# Altium PCB PCB1.PcbDoc
Units mil, origin at the board's own origin, x right, y up, seen from the top; angles counter-clockwise.
Board outline 4105.03 x 2720.03 mil, 2 copper layers (Top Layer, Bottom Layer); 30 components, 27 nets, 147 pads, 19 vias.
Unrouted connection lines stored in the file: 2.
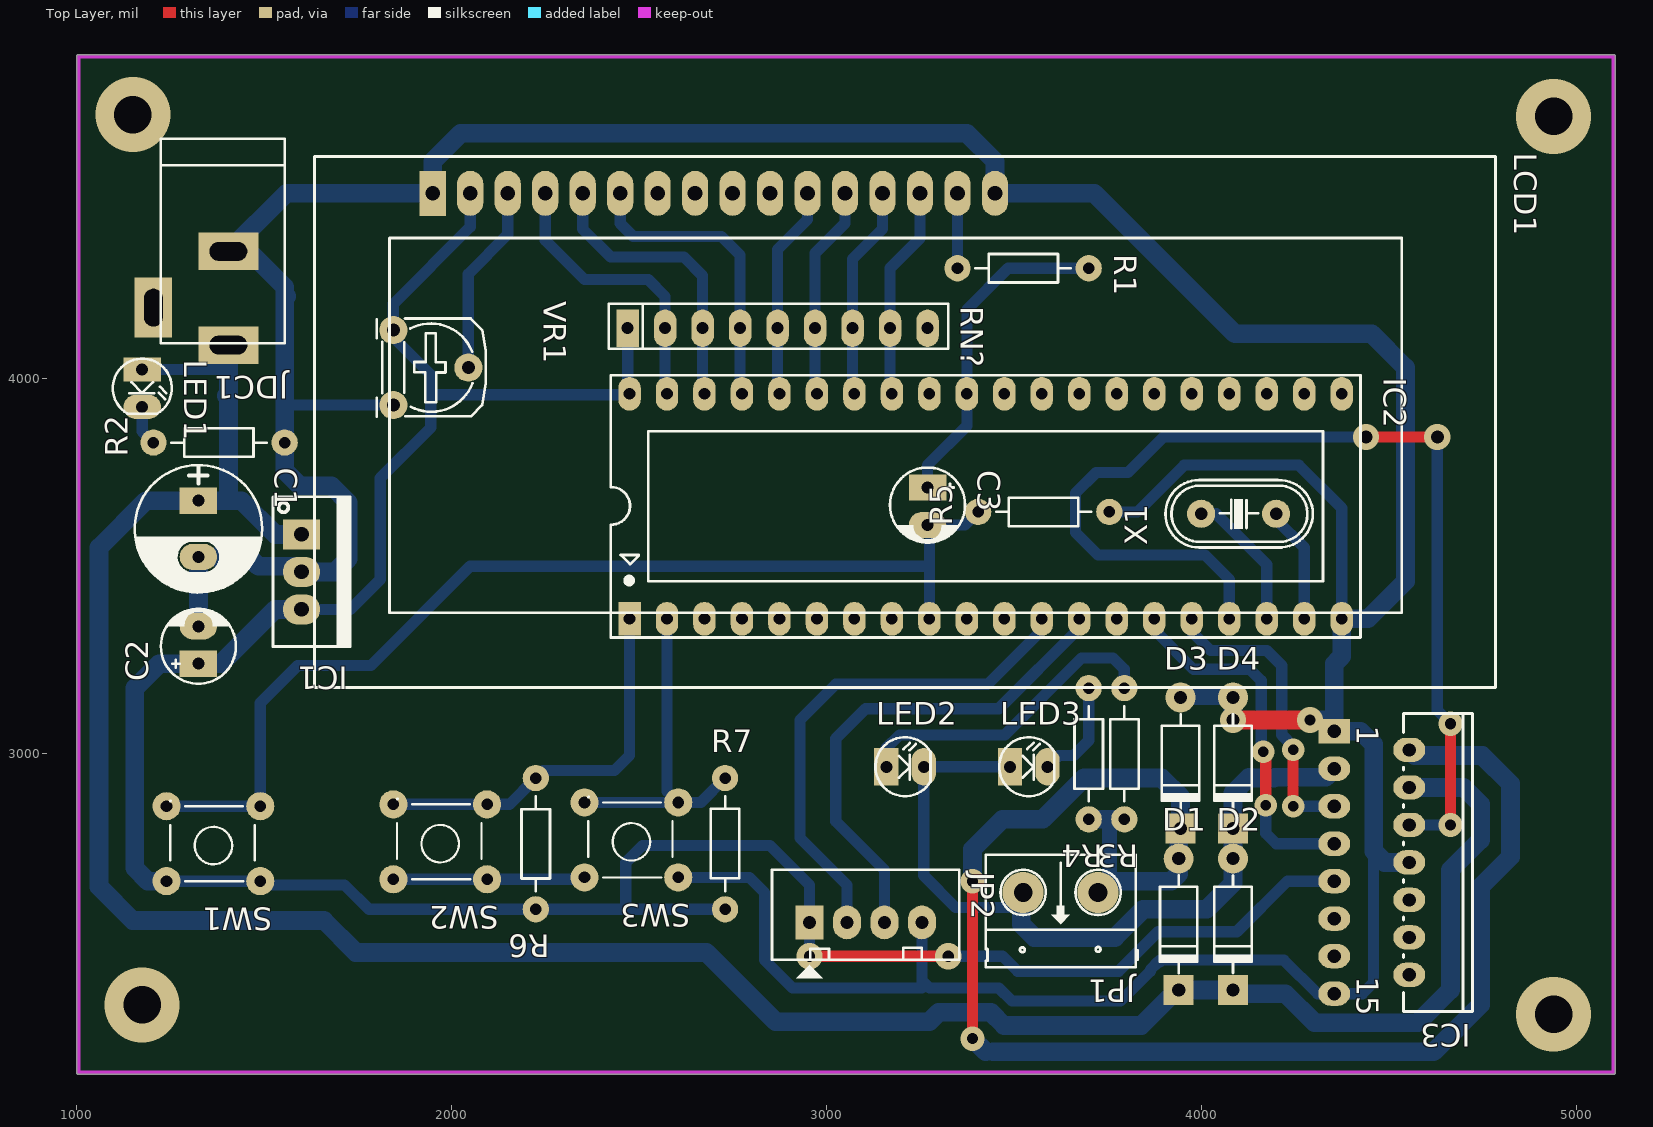
[diagram p0: Top Layer view]
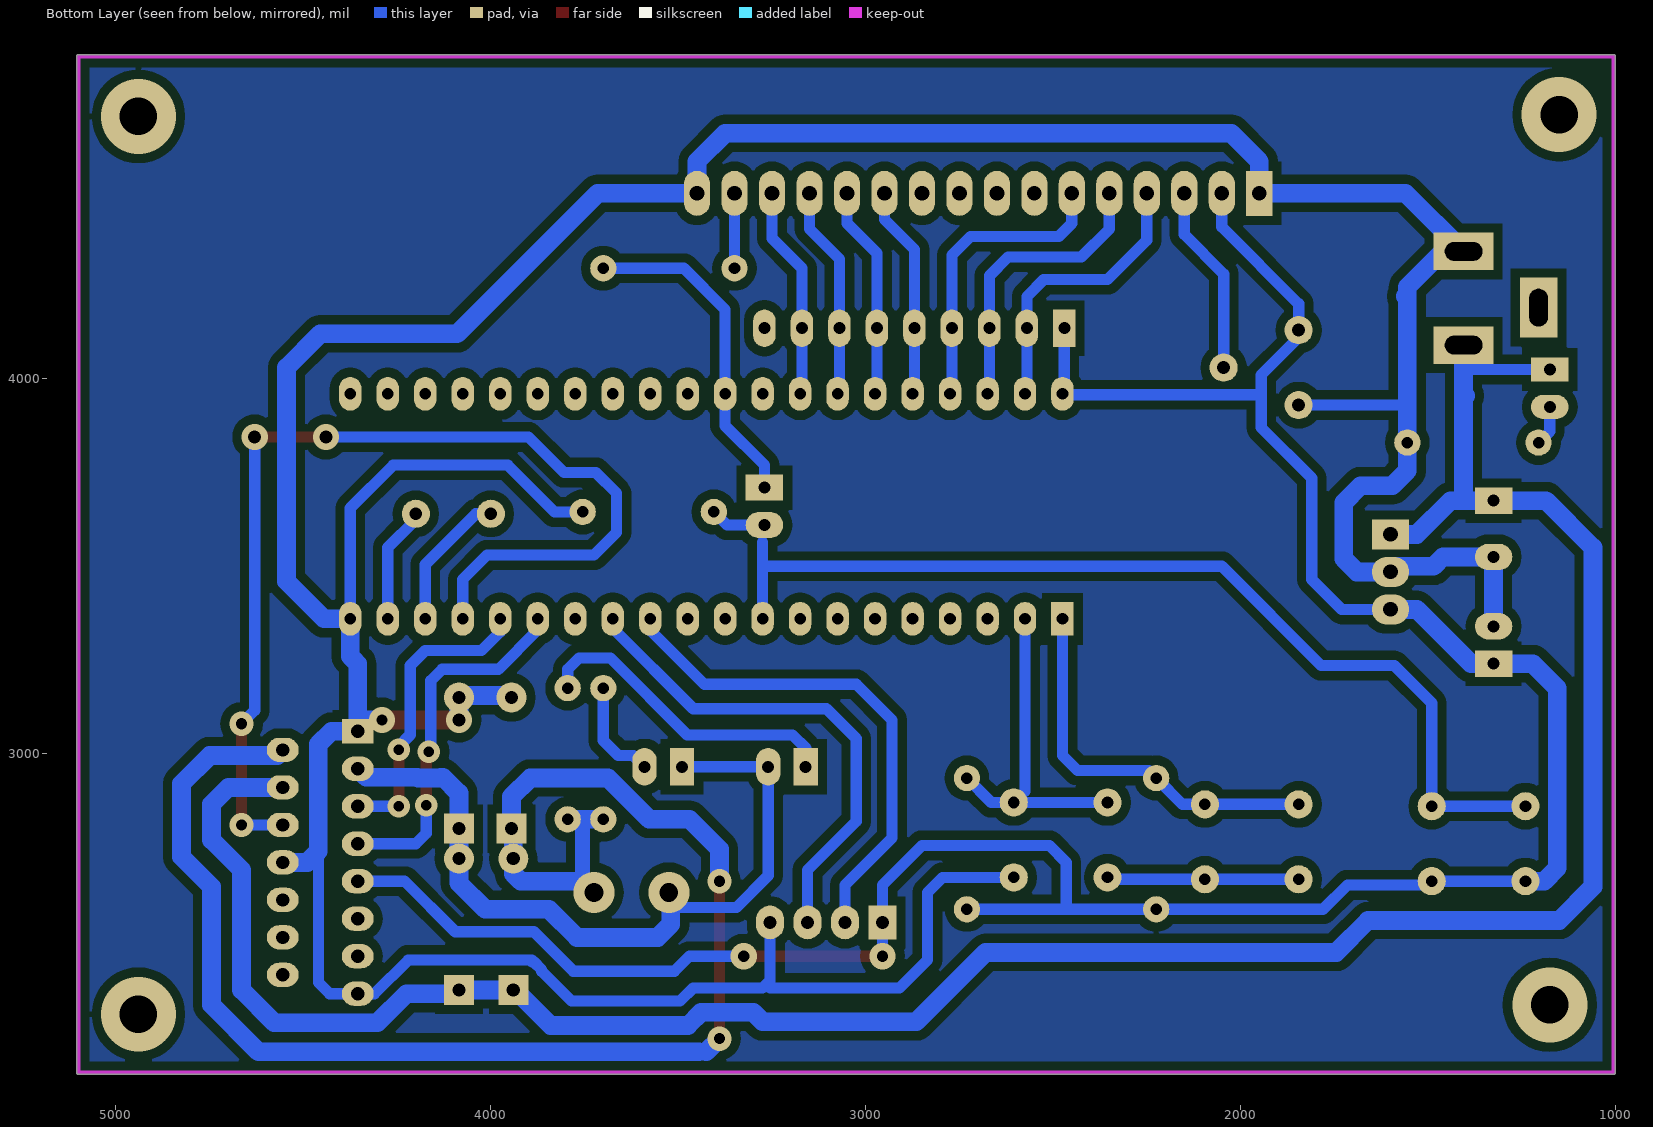
[diagram p1: Bottom Layer view, seen from below]
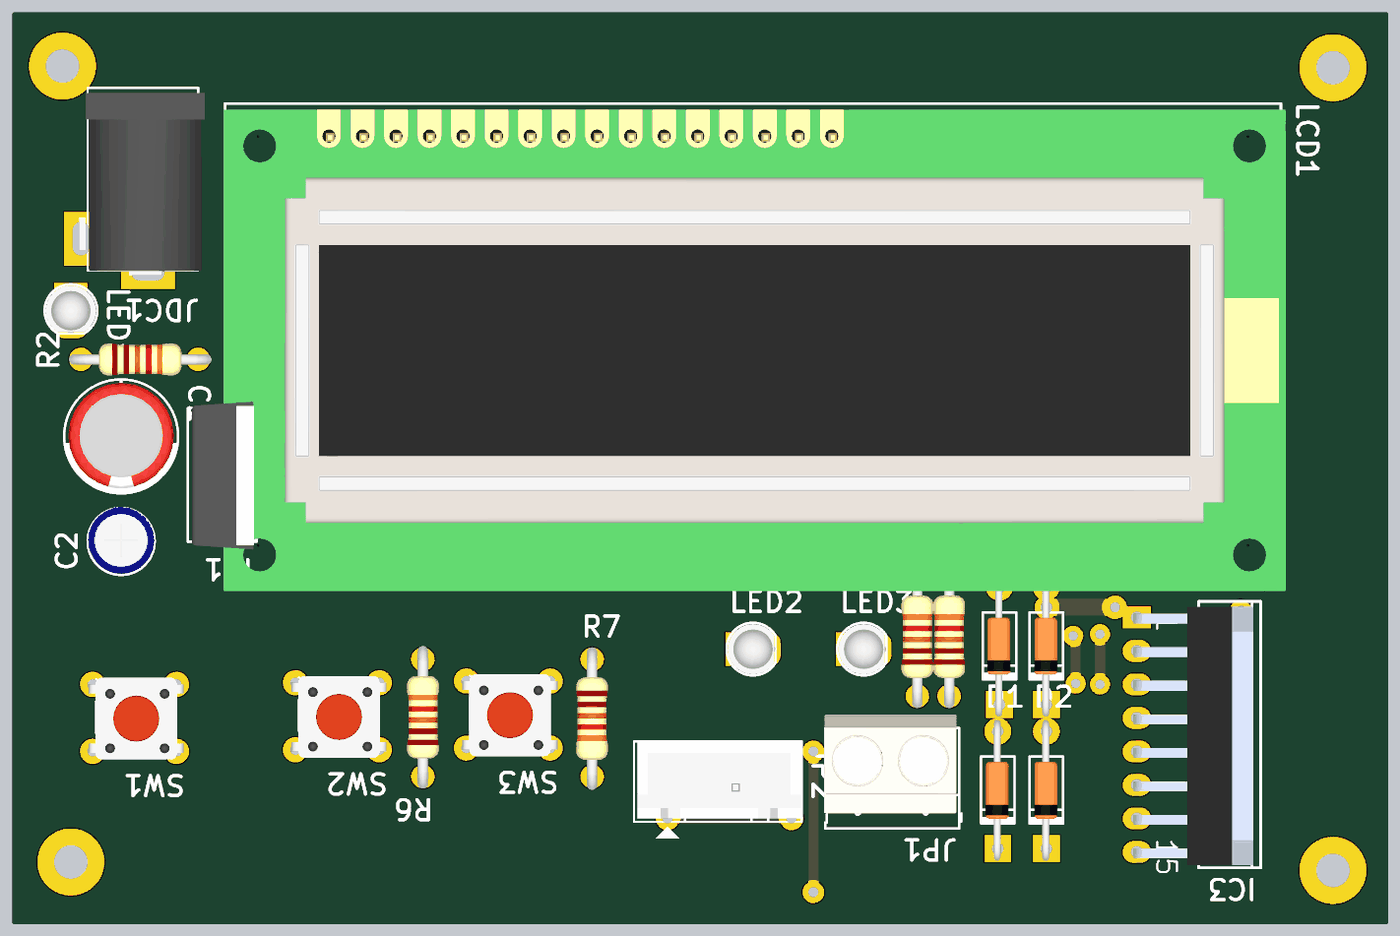
[diagram p2: 3D render of the assembled board from above, using the file's embedded part models]

## Layer stack, top to bottom
Top Layer: signal copper 1.4
Dielectric: dielectric 12.6, FR-4, Dk 4.8
Bottom Layer: signal copper 1.4

## Board outline
1005,2144.99 cw(c1005,2150) 999.99,2150 999.99,4860 cw(c1005,4860) 1005,4865.02 5100,4865.02 cw(c5100,4860) 5105.02,4860 5105.02,2150 cw(c5100,2150) 5100,2144.99

## Design rules (kind name [scope] priority, off if disabled: settings)
Clearance [All] p1: gap=25
PolygonConnect [All] p1: connectstyle=Relief reliefconductorwidth=10 reliefentries=4 polygonreliefangle="90 Angle"
RoutingVias [All] p1: holewidth=28 width=50 viastyle="Through Hole" minholewidth=28 minwidth=50 maxholewidth=28 maxwidth=50
SilkscreenOverComponentPads [All] p1: minsilkscreentomaskgap=10
SolderMaskExpansion [All] p1: expansion=4
Width [All] p1: maxlimit=50 minlimit=30 preferedwidth=40
27 further rules are at their usual default settings.

## Components (designator, comment, footprint, x,y, rotation, side; value= is the part's Value field where it differs from the comment)
C1 "1000uF/16V" CP1.5/3.4 1325,3675 r270 top
C2 "10uF" CP1/2 1325,3240 r90 top
C3 "10uF" CP1/2 3270,3710 r270 top
D1 "1N4007" D1A 3940,2720 r90 top
D2 "1N4007" D1A 4085,2720 r90 top
D3 "1N4007" D1A 3945,3150 r90 top
D4 "1N4007" D1A 4085,3150 r90 top
IC1 "LM7805" QTO-220 1600,3585 r270 top
IC2 "AT89S52" DIP40/W0.6 2475,3360 r0 top
IC3 "L298" DIP15SL2 4455,2710 r270 top
JDC1 "Jac DC" DC-IN 1305,4215 r270 top
JP1 "Header 2_1" HED2 3725,2630 r180 top
JP2 "JP4" CON4 2955,2550 r0 top
LCD1 "LCD16x2A" LCD16X2 1950,4495 r0 top
LED1 "LED" LED-3 1175,4025 r270 top
LED2 "LED" LED-3 3160,2965 r0 top
LED3 "LED" LED-3 3490,2965 r0 top
R1 "330" R1/4W 3350,4295 r0 top
R2 "1k" R1/4W 1555,3830 r180 top
R3 "1k" R1/4W 3795,3175 r270 top
R4 "1k" R1/4W 3700,3175 r270 top
R5 "10k" R1/4W 3755,3645 r180 top
R6 "10k" R1/4W 2225,2935 r270 top
R7 "10k" R1/4W 2730,2585 r90 top
RN? "10K" RN8 2470,4135 r0 top
SW1 "SW" SW4 1490,2660 r180 top
SW2 "SW" SW4 2095,2665 r180 top
SW3 "SW" SW4 2605,2670 r180 top
VR1 "10K" VR 1845,4130 r270 top
X1 "12Mhz" XT2 4100,3640 r180 top

## Footprints (in the part's own frame and the unit in brackets; to place one, negate y for a bottom-side part, rotate by r counter-clockwise, add the part's x,y. Pads: shape width x height; smd on the part's side, far side on the other; paste and mask are expansions set on the pad)
CON4 [mil] "CON4"
  rect 75x90 hole 34: 1(0,0)
  oval 75x90 hole 34: 2(100,0) 3(200,0) 4(300,0)
  silkscreen extent -100,-150 400,140, body extent -90,-90 398,136, height 276
CP1.5/3.4 [mil] "Tu hoa 220->470uF,16V, 470uF/16V,25V"
  rect 70x100 hole 32: 1(0,0)
  oval 70x100 hole 32: 2(150,0)
  silkscreen extent -95,-170 245,170, body extent -85,-157 230,157, height 446
CP1/2 [mil] "Tu hoa < 22uF/16>50V"
  rect 70x100 hole 32: 1(0,0)
  oval 70x100 hole 32: 2(100,0)
  silkscreen extent -53,-100 146,100, body extent -49,-99 149,99, height 287
D1A [mil] "Diode 1A, W 100mil, L 350mil"
  round 80 hole 35: 1(0,0)
  rect 80x80 hole 35: 2(-350,0)
  silkscreen extent -305,-50 -45,50, body extent -386,-33 34,36, height 84
DC-IN [mil] "Jac DC input"
  rect 100x160 hole 50 slot 100 at 90 deg: 1(125,100) 2(-125,100)
  rect 160x100 hole 50 slot 100 at 0 deg: 3(25,-100)
  silkscreen extent -425,-80 120,250, body extent -410,-105 134,269, height 434
DIP15SL2 [mil] "TO, Thru-Hole, Vertical, Heatsink Mounted; 15 Bent Staggered Leads; Pitch 1.27 mm"
  rect 65x85 hole 35.43: 1(-350,-100)
  oval 65x85 hole 35.43: 2(-300,100) 3(-250,-100) 4(-200,100) 5(-150,-100) 6(-100,100) 7(-50,-100) 8(0,100) 9(50,-100) 10(100,100) 11(150,-100) 12(200,100) 13(250,-100) 14(300,100) 15(350,-100)
  silkscreen extent -398,84 398,269, body extent -382,-110 390,247, height 895
DIP40/W0.6 [mil] "40 PIN, W 600mil, Pin to pin 100mil"
  rect 60x90 hole 31: 1(0,0)
  oval 60x90 hole 31: 2(100,0) 3(200,0) 4(300,0) 5(400,0) 6(500,0) 7(600,0) 8(700,0) 9(800,0) 10(900,0) 11(1000,0) 12(1100,0) 13(1200,0) 14(1300,0) 15(1400,0) 16(1500,0) 17(1600,0) 18(1700,0) 19(1800,0) 20(1900,0) 21(1900,600) 22(1800,600) 23(1700,600) 24(1600,600) 25(1500,600) 26(1400,600) 27(1300,600) 28(1200,600) 29(1100,600) 30(1000,600) 31(900,600) 32(800,600) 33(700,600) 34(600,600) 35(500,600) 36(400,600) 37(300,600) 38(200,600) 39(100,600) 40(0,600)
  silkscreen extent -50,-50 1950,650, body extent -82,-10 1982,600, height 224
HED2 [mil] "Header 2, 2 pin, hight 300mil, Pin to Pin 200, Colour Green"
  round 110 hole 50: 1(0,0) 2(200,0)
  silkscreen extent -106,-100 300,200, body extent -92,-140 302,155, height 394
LCD16X2 [mil] "LCD dipslay 16x2, 16 pin"
  rect 70x120 hole 39.37: 1(0,0)
  oval 70x120 hole 39.37: 2(100,0.02) 3(200,0) 4(300,0) 5(400,0) 6(500,0) 7(600,0) 8(700,0) 9(800,0) 10(900,0) 11(1000,0) 12(1100,0) 13(1200,0) 14(1300,0) 15(1400,0) 16(1500,0)
  round 0 all layers, no hole: M1(-216.54,0) M2(2736.22,0) M3(-216.54,-1220.47) M4(2736.22,-1220.47)
  silkscreen extent -315,-1319 2835,98, body extent -320,-1357 2849,80, height 714
LED-3 [mil] "LED 2 PIN, 3ly Only colour"
  rect 65x100 hole 32: 1(0,0)
  oval 65x100 hole 32: 2(100,0)
  silkscreen extent -29,-78 118,79, body extent -25,-75 113,75, height 217
QTO-220 [mil] "TO-220 - 1-2-3"
  rect 80x100 hole 39: 1(0,0)
  oval 80x100 hole 39: 2(100,0) 3(200,0)
  silkscreen extent -100,-76 300,130, body extent -119,-64 322,121, height 755
R1/4W [mil] "R 1/4W, 2 Pin, 350mil"
  round 70 hole 31: 1(0,0) 2(350,0)
  silkscreen extent 48,-38 302,38, body extent -40,-47 386,47, height 111
RN8 [mil] "R SIP8, 9 Pin"
  rect 60x100 hole 32: 1(0,0)
  oval 60x100 hole 32: 2(100,0) 3(200,0) 4(300,0) 5(400,0) 6(500,0) 7(600,0) 8(700,0) 9(800,0)
  silkscreen extent -50,-55 855,65, body extent -43,-20 843,29, height 219
SW4 [mil] "SW button 4pin, 250 x250 mil"
  round 75 hole 31: 1(0,0) 2(250,-200) 3(250,0) 4(0,-200)
  silkscreen extent 15,-215 240,0, body extent -36,-220 276,24, height 276
VR [mil] "Resistor Variable"
  round 75 hole 35: 1(0,0) 2(100,200) 3(200,0)
  silkscreen extent -31,-44 231,246, body extent -87,-30 307,372, height 165
XT2 [mil] "Footpin for Crystal 2 pin"
  round 75 hole 34: 1(-100,0) 2(100,0)
  silkscreen extent -198,-90 195,90, body extent -233,-93 213,90, height 138

## Part data
C1: library part CP4, "Cap 1000uF/16V - 220uF/50V"
C2 C3: library part CP1, "Cap P  0,1uF < 22uF , 16 - 50V"
D1 D2 D3 D4: library part D1A, "Diode 1A"
IC1: library part LM78xx, "On ap +, from + 5 to + 24VDC"
IC2: "AT89S52, 8k Byte Flash Memory , 40 Pin"
IC3: "Dual Full-H Driver"
JDC1: library part DCIN, "Jac DC input"
JP1: "Header, 2-Pin"
JP2: library part Con4, "Connector 4"
LCD1: library part LCD16x2, "LCD dipslay 16 char, 2 line"
LED1 LED2 LED3: "LED Single colour Green and Red"
R1 R2 R3 R4 R5 R6 R7: library part R1/4W, "Resistor 1/4W"
RN?: library part RN8, "Resistor 8 (Thanh)"
SW1 SW2 SW3: library part SW4, "Switch button 4 pin"
VR1: library part VR, "Var Resistor"
X1: library part XT2, "Crystal For all Crystal 2pin."

## Via types
v1: diameter 65, hole 30, Top Layer to Bottom Layer, 4 vias
v2: diameter 60, hole 28, Top Layer to Bottom Layer, 4 vias
v3: diameter 200, hole 100, Top Layer to Bottom Layer, 4 vias
v4: diameter 70, hole 30, Top Layer to Bottom Layer, 3 vias
v5: diameter 70, hole 35, Top Layer to Bottom Layer, 3 vias
v6: diameter 50, hole 28, Top Layer to Bottom Layer, 1 vias

## Nets (pads, with @x,y where several pads share a name; then routed paths per layer and width w, separated by ;. In a path a pad name is that pad's centre, name@x,y a point inside that pad or via, vN(x,y) a via of type N, cw(c..) or ccw(c..) an arc to the next point about the centre after c; other vN are vias at no path point)
A: IC2.16 IC3.5 | length 824.7
  Top Layer w30: v2(4245,2860) v2@4245,3020
  Bottom Layer w30: IC2.16 3975,3325 4025,3275 4175,3275 4215,3235 4215,3050.71 4245,3020.71 v2@4245,3005 ; v2(4245,2860) IC3.5
  other v2: 4245,3010
B: IC2.15 IC3.7 | length 969.8
  Top Layer w30: v2(4165,3005) v2@4165,3010 ; v2(4172.5,2862.5) v2@4172.5,3007.5
  Bottom Layer w30: IC2.15 3875,3330 3980,3225 4130,3225 4160,3195 v2@4160,3020 ; v2(4165,3005) v2@4165,3010 ; v2(4172.5,2862.5) 4172.5,2787.5 4200,2760 IC3.7
BT1: IC2.1 R6.1 SW2.2 SW2.4 | length 1048.8
  Bottom Layer w30: SW2.2 SW2.4 2155,2865 R6.1 2245,2955 2435,2955 2475,2995 IC2.1
BT2: IC2.2 R7.2 SW3.2 SW3.4 | length 861.9
  Bottom Layer w30: SW3.2 SW3.4 2665,2870 R7.2 ; 2575,2900 IC2.2
EN: IC2.37 LCD1.6 RN?.4 | length 800.2
  Bottom Layer w30: LCD1.6 2450,4415 2485,4380 2720,4380 2770,4330 RN?.4 IC2.37@2770,3965
ENCODER_A: IC2.12 JP2.2 | length 1366.2
  Bottom Layer w30: JP2.2 3055,2650 2930,2775 2930,3090 3025,3185 3430,3185 3575,3330 IC2.12
ENCODER_B: IC2.13 JP2.3 | length 1341
  Bottom Layer w30: JP2.3 3155,2690 3025,2820 3025,3040 3105,3120 3460,3120 3675,3335 IC2.13
GND: C1.2 C2.2 D3.1 D4.1 IC1.2 IC2.20 IC3.1 IC3.8 IC3.15 JDC1.2 JP2.4 LCD1.1 LCD1.16 R2.1 R5.1 SW2.1 SW2.3 SW3.1 SW3.3 VR1.3 | length 12045.7
  Top Layer w50: v5(4085,3090) v4(4290,3090)
  Bottom Layer w30: 1555,3945 1570,3930 VR1.3 ; SW2.3 SW2.1 SW3.3@2350,2665 ; SW3.1 2795,2670 2835,2630 2835,2450 2910,2375 3255,2375 JP2.4 ; 3255,2395 3275,2375 3460,2375 3495,2340 3785,2340 3865,2420 3865,2424.5 3885.5,2445 3890,2445 3890.5,2445.5 ; R5.1 3830,3645 3955,3770 4260,3770 4375,3655 IC2.20 ; 3890.5,2450 4220,2450 4310,2360 IC3.15 4430,2360 4460,2390 4460,2740
  Bottom Layer w40: D3.1 D4.1
  Bottom Layer w50: C2.2 C1.2 1460,3525 1485,3500 1585,3500 IC1.2 1690,3485 1725,3520 1725,3670 1680,3715 1595,3715 1555,3755 R2.1 1555,3945 1555,4215 ; 1560,4220 1555,4215 ; D3.1@3940,3155 D4.1@4080,3155 ; v5(4085,3090) D4.1 ; v4(4290,3090) 4325,3090 IC3.1 ; 4355,3240 IC3.1 ; 4360,3245 4375,3260 IC2.20 4445,3360 4545,3460 4545,4030 4455,4120 4090,4120 3715,4495 LCD1.16 3450,4580 3375,4655 2025,4655 1950,4580 LCD1.1 1560,4495 JDC1.2 1460,4340 1555,4245 1555,4215 ; IC3.8 4490,2710 4460,2740 4460,3025 4425,3060 IC3.1
LCD4: IC2.36 LCD1.11 RN?.5 | length 563.1
  Bottom Layer w30: IC2.36@2870,3965 RN?.5 2870,4345 2950,4425 LCD1.11
LCD5: IC2.35 LCD1.12 RN?.6 | length 563.1
  Bottom Layer w30: IC2.35@2970,3965 RN?.6 2970,4335 3050,4415 LCD1.12
LCD6: IC2.34 LCD1.13 RN?.7 | length 563.1
  Bottom Layer w30: IC2.34@3070,3965 RN?.7 3070,4320 3150,4400 LCD1.13
LCD7: IC2.33 LCD1.14 RN?.8 | length 563.1
  Bottom Layer w30: IC2.33@3170,3965 RN?.8 3170,4295 3250,4375 LCD1.14
NetC3_2: C3.2 IC2.9 R5.2 SW1.2 SW1.4 | length 2815.7
  Bottom Layer w30: SW1.2 SW1.4 1490,3135 1590,3235 1785,3235 2050,3500 3275,3500 ; C3.2 3370,3610 R5.2 ; IC2.9 3275,3500 ; 3275,3565 3275,3500
NetD1_1: D1.1 D3.2 IC3.2 JP1.1 R3.2 R4.2 | length 4292.2
  Top Layer w30: v1(3390,2240) v1(3390,2660)
  Bottom Layer w30: 3425,2205 3445,2205
  Bottom Layer w40: JP1.1@3745,2615 3755,2625 3755,2650 3755,2825 ; R3.2 R3.2@3800,2825
  Bottom Layer w50: v1(3390,2240) 3425,2205 ; v1(3390,2660) 3390,2745 3470,2825 3577.1,2825 3687.1,2935 3895,2935 3945,2885 D3.2 ; 3445,2205 4620,2205 4745,2330 4745,2645 4825,2725 4825,2920 4750,2995 4570,2995 IC3.2 ; R4.2 3755,2825 R3.2 ; JP1.1@3720,2615 3755,2650 3765,2660 3920,2660 3940,2680 D1.1 D3.2@3940,2815
NetD2_1: D2.1 D4.2 IC3.3 JP1.2 LED2.2 LED3.1 | length 2021.3
  Bottom Layer w30: LED2.2 3260,2675 3345,2590 JP1.2@3520,2590 ; LED2.2@3277.5,2965 LED3.1
  Bottom Layer w50: JP1.2@3520,2590 3520,2545 3555,2510 3770,2510 3845,2585 4015,2585 4085,2655 D2.1 D4.2 4085,2895 4127.5,2937.5 4133.51,2937.5 4136.01,2935 4193.99,2935 4196.49,2937.5 4332.5,2937.5 IC3.3
NetIC2_18: IC2.18 X1.2 | length 375.9
  Bottom Layer w30: X1.2 4040,3640 4175,3505 IC2.18
NetIC2_19: IC2.19 X1.1 | length 311.1
  Bottom Layer w30: X1.1 4200,3625 4275,3550 IC2.19
NetLCD1_3: LCD1.3 VR1.2 | length 508.5
  Bottom Layer w30: VR1.2 2045,4280 2150,4385 LCD1.3
NetLCD1_15: LCD1.15 R1.1 | length 200
  Bottom Layer w30: R1.1 LCD1.15
NetLED1_2: LED1.2 R2.2 | length 107.4
  Bottom Layer w30: LED1.2 1175,3860 R2.2
NetLED2_1: LED2.1 R3.1 | length 836.8
  Bottom Layer w30: LED2.1 3160,3015 3195,3050 3476.01,3050 3681.01,3255 3765,3255 3795,3225 R3.1@3795,3185
NetLED3_2: LED3.2 R4.1 | length 289
  Bottom Layer w30: LED3.2 3590.15,2965 3620.15,2995 3660,2995 3700,3035 R4.1@3700,3185
PWM: IC2.17 IC3.6 | length 2858.4
  Top Layer w30: v5(4440,3845) v5(4630,3845) ; v1(4665,2810) v1(4665,3080)
  Bottom Layer w30: IC2.17 4075,3465 4010,3530 3725,3530 3665,3590 3665,3695 3720,3750 3805,3750 3900,3845 v5(4440,3845) ; IC3.6 v1(4665,2810) ; v5(4630,3845) 4630,3115 v1(4665,3080)
  other v6: 4665,2810
RS: IC2.39 LCD1.4 RN?.2 | length 769.2
  Bottom Layer w30: LCD1.4 2250,4370 2355,4265 2525,4265 2570,4220 RN?.2 2570,3965 IC2.39
RW: IC2.38 LCD1.5 RN?.3 | length 783.8
  Bottom Layer w30: LCD1.5 2350,4400 2425,4325 2620,4325 2670,4275 RN?.3 2670,3965 IC2.38
VCC: C2.1 C3.1 IC1.3 IC2.31 IC2.40 IC3.9 JP2.1 LCD1.2 R1.2 R6.2 R7.1 RN?.1 SW1.1 SW1.3 VR1.1 | length 8064.3
  Top Layer w30: v4(2955,2460) v4(3325,2460)
  Bottom Layer w30: SW1.3 SW1.1 1500,2650 1715,2650 1780,2585 R6.2 2465,2585 ; IC1.3 1730,3385 1810,3465 1810,3735 1945,3870 1945,3950 ; LCD1.2 2050,4405 1845,4200 VR1.1 1845,4110 1945,4010 1945,3950 ; IC2.40@2470,3965 RN?.1 ; IC2.40 2472.5,3957.5 1952.5,3957.5 1945,3950 ; R7.1 2465,2585 ; v4(2955,2460) JP2.1 2955,2650 2850,2755 2510,2755 2465,2710 2465,2585 ; C3.1 3270,3770 3375,3875 IC2.31 3375,4185 3485,4295 R1.2 ; v4(3325,2460) 3470,2460 3510,2420 3780,2420 3885,2525 4095,2525 4230,2660 IC3.9
  Bottom Layer w50: SW1.3 1190,2660 1155,2695 1155,3175 1220,3240 C2.1 1385,3240 1530,3385 IC1.3
VCC_9V: C1.1 D1.2 D2.2 IC1.1 IC3.4 JDC1.1 LED1.1 | length 6823.4
  Bottom Layer w30: LED1.1 1400,4025 1405,4020
  Bottom Layer w50: 1400,3955 1405,3950 ; JDC1.1 1405,4020 1405,3950 ; IC1.1 1530,3585 1440,3675 1410,3675 ; IC3.4 4663.99,2910 ; 4665,2908.99 4663.99,2910 ; 1405,3950 1405,3680 1410,3675 ; 1410,3675 C1.1 1185,3675 1060,3550 1060,2645 1150,2555 1660,2555 1745,2470 2680,2470 2865,2285 3275,2285 3300,2310 3438.99,2310 3473.99,2275 3840,2275 3940,2375 3945,2370 D2.2 4095,2360 4225,2360 4302.5,2282.5 4577.5,2282.5 4665,2370 4665,2690 4745,2770 4745,2865 4700,2910 4663.99,2910
pads on no net: IC2.3 IC2.4 IC2.5 IC2.6 IC2.7 IC2.8 IC2.10 IC2.11 IC2.14 IC2.21 IC2.22 IC2.23 IC2.24 IC2.25 IC2.26 IC2.27 IC2.28 IC2.29 IC2.30 IC2.32 IC3.10 IC3.11 IC3.12 IC3.13 IC3.14 JDC1.3 LCD1.7 LCD1.8 LCD1.9 LCD1.10 LCD1.M1 LCD1.M2 LCD1.M3 LCD1.M4 RN?.9
copper on no net:
  other v3: 4940,2305 1175,2330 4940,4700 1150,4705

## Polygon pours and split planes (outlines as drawn)
no net on Bottom Layer "Top Layer-No Net" (solid, pour order 4): 1020,4860 5095,4860 5100,4855 5100,2150 1005,2150

## Keep-outs
Keep-Out Layer:
  lines w10: 1005,2150 5100,2150 5100,4860 1005,4860 1005,2150

## Text inside footprints (layer, text, board x,y; h text height)
IC3: Top Overlay "15" at 4415,2405 h59.06 r270; Top Overlay "1" at 4415,3075 h59.06 r270